# Altium PCB TailLightsPrototypeRev3.PcbDoc
Units mil, origin at the board's own origin, x right, y up, seen from the top; angles counter-clockwise.
Board outline 1745 x 1777.8 mil, 2 copper layers (Top Layer, Bottom Layer); 31 components, 42 nets, 79 pads, 21 vias.
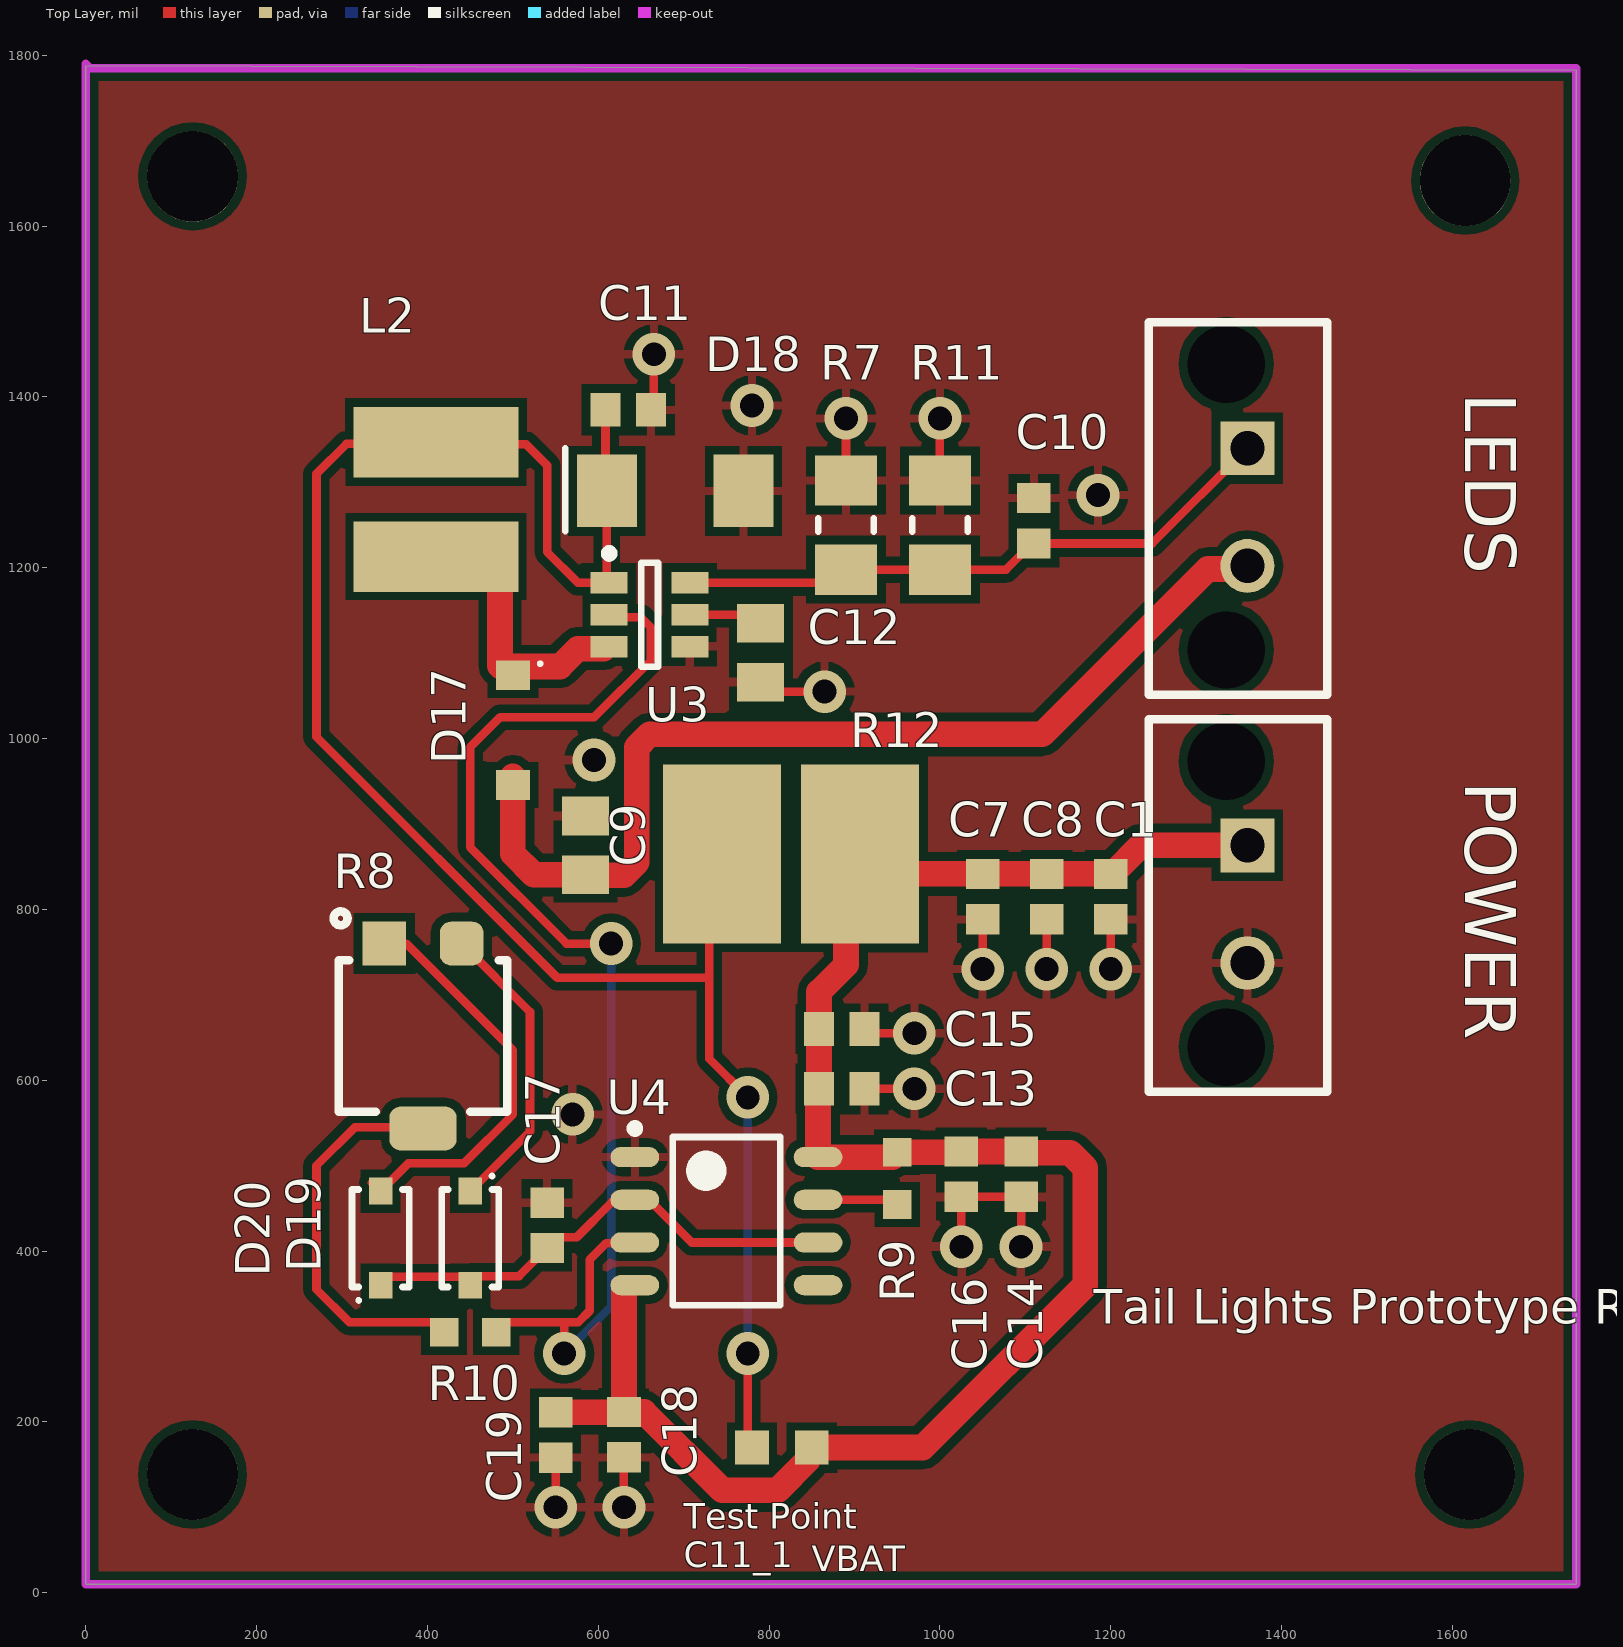
[diagram p0: Top Layer view]
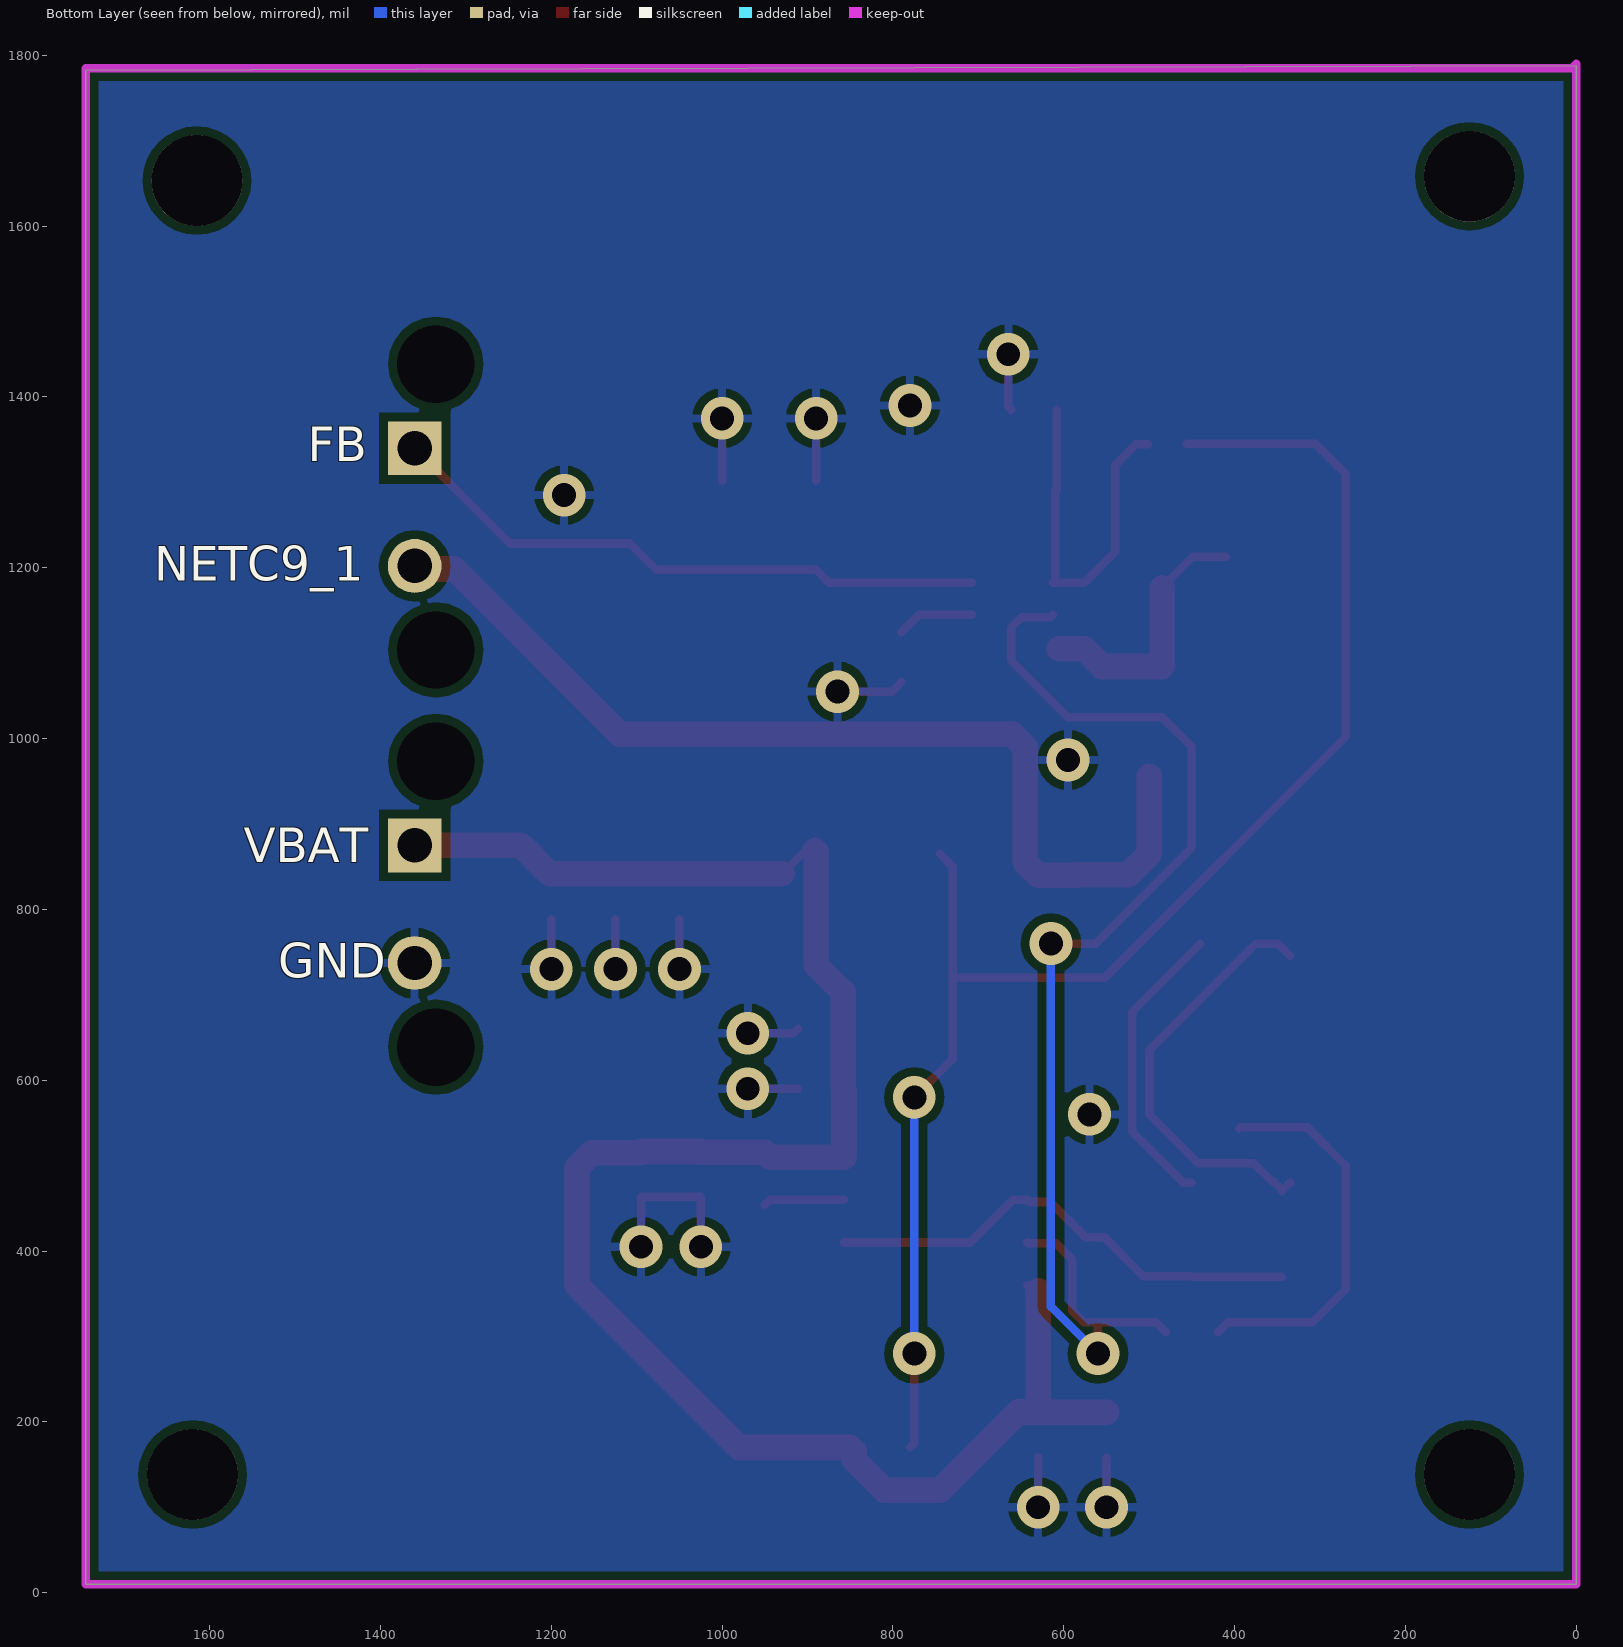
[diagram p1: Bottom Layer view, seen from below]
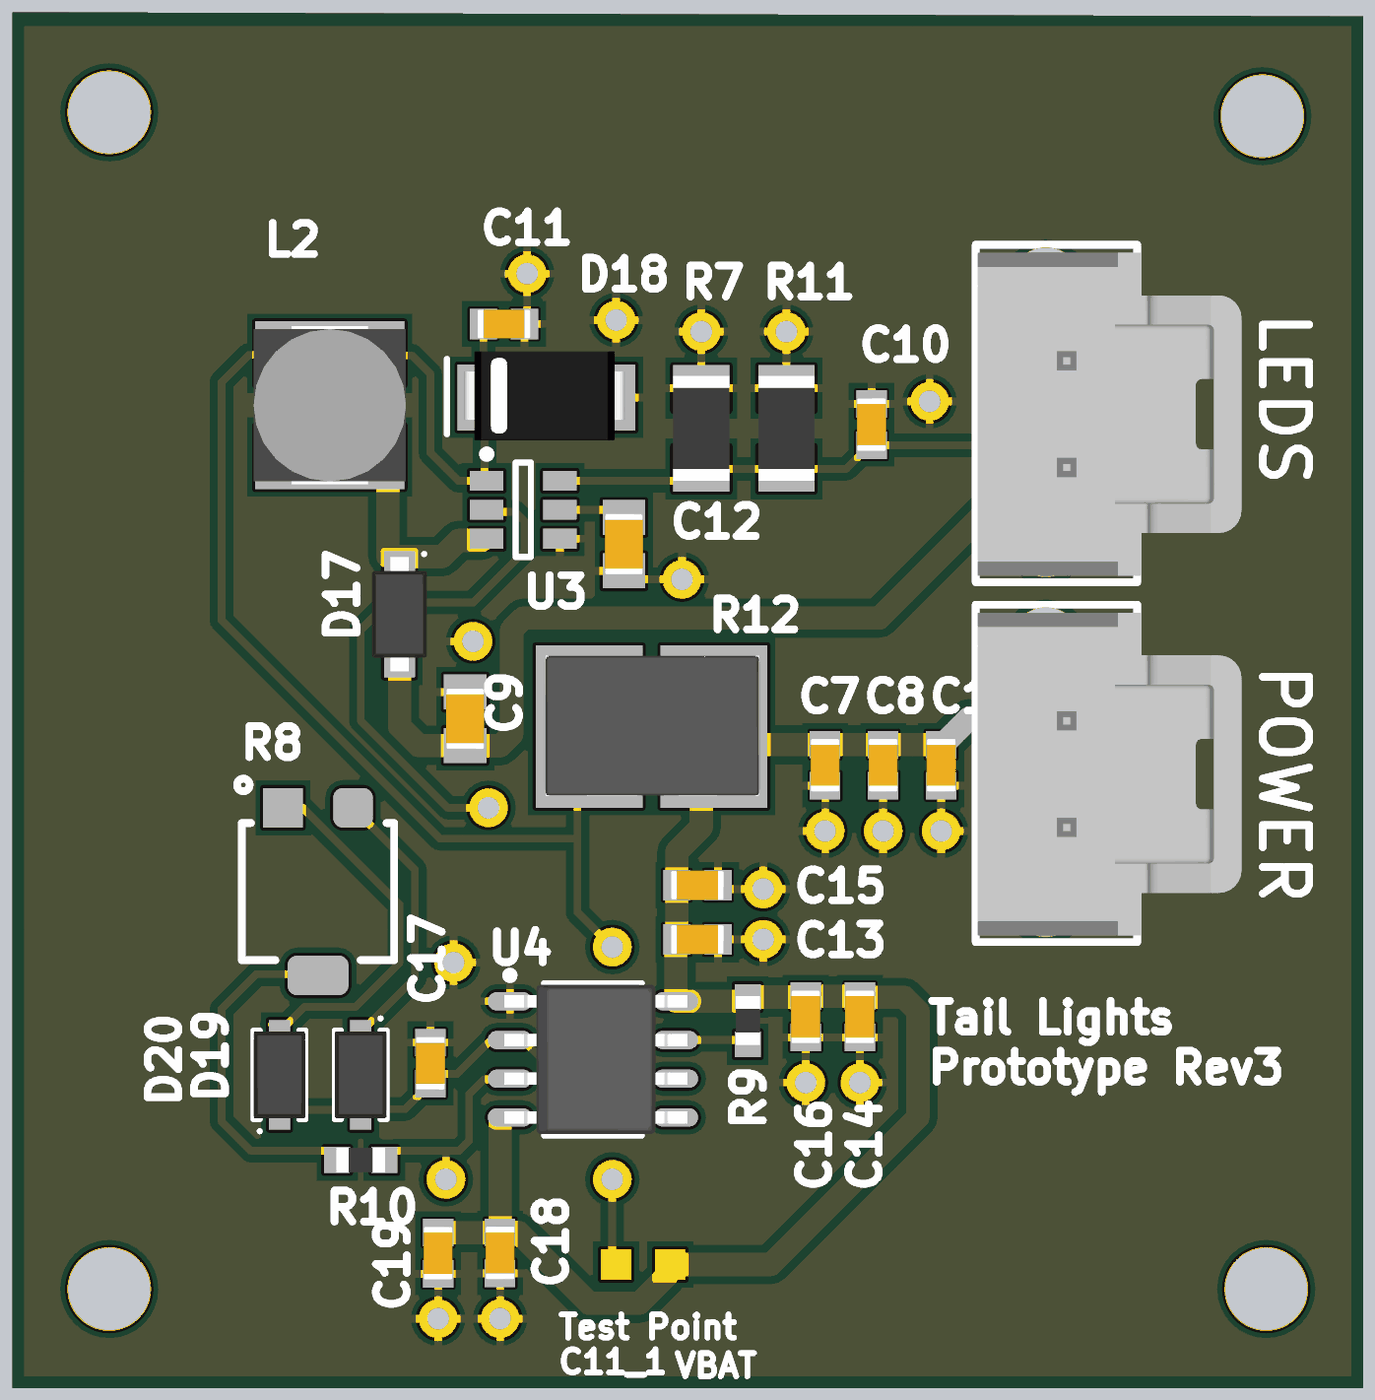
[diagram p2: 3D render of the assembled board from above, using the file's embedded part models]

## Layer stack, top to bottom
Top Solder: solder mask 0.4, Solder Resist, Dk 3.5
Top Layer: signal copper 1.4
Dielectric 1: dielectric 12.6, FR-4, Dk 4.8
Bottom Layer: signal copper 1.4
Bottom Solder: solder mask 0.4, Solder Resist, Dk 3.5

## Board outline
0,1787.8 0,10 1745,10 1745,1782.34

## Design rules (kind name [scope] priority, off if disabled: settings)
Clearance [All] p1: gap=10 ignorepadtopadclearanceinfootprint=FALSE except(0: Arc-Hole Track-Hole SMDPad-Hole THPad-Hole Via-Hole Fill-Hole Poly-Hole Region-Hole Text-Hole)
PolygonConnect [All] p1: connectstyle=Relief reliefconductorwidth=10 reliefentries=4 polygonreliefangle="90 Angle" airgapwidth=10
RoutingVias [All] p1: holewidth=28 width=50 viastyle="Through Hole" minholewidth=28 minwidth=50 maxholewidth=28 maxwidth=50
SolderMaskExpansion [All] p1: expansion=4 istentingtop=FALSE
Width [All] p1: maxlimit=30 minlimit=10 preferedwidth=10 minimp=50.000000 maximp=50.000000 favimp=50.000000
30 further rules are at their usual default settings.

## Classes and differential pairs
component class TailLightPrototypeRev3: C1 C7 C8 C9 C10 C11 C12 C13 C14 C15 C16 C17 C18 C19 D17 D18 D19 D20 L2 LEDS POWER R7 R8 R9 R10 R11 R12 U3 U4

## Components (designator, comment, footprint, x,y, rotation, side; value= is the part's Value field where it differs from the comment)
C1 "CAP CER 4.7UF 25V 10% X5R 0603" "CAP, 0603" 1200,815 r270 top
C7 "CAP CER 0.1UF 50V 10% X7R 0603" "CAP, 0603" 1050,815 r270 top
C8 "CAP CER 4.7UF 25V 10% X5R 0603" "CAP, 0603" 1125,815 r270 top
C9 "CAP CER 4.7UF 50V 10% X5R 0805" "CAP, 0805" 585,875 r90 top value=4.7uF
C10 "CAP CER 10nF 50V 5% X7R 0603" "CAP, 0603" 1110,1255 r90 top
C11 "CAP CER 1UF 50V 10% X7R 0603" "CAP, 0603" 635,1385 r0 top
C12 "CAP CER 0.22UF 50V X7R 0805" "CAP, 0805" 790,1100.55 r270 top
C13 "CAP CER 0.1UF 50V 10% X7R 0603" "CAP, 0603" 885,590 r180 top
C14 "CAP CER 0.1UF 50V 10% X7R 0603" "CAP, 0603" 1095,490 r90 top
C15 "CAP CER 4.7UF 25V 10% X5R 0603" "CAP, 0603" 885,660 r180 top
C16 "CAP CER 4.7UF 25V 10% X5R 0603" "CAP, 0603" 1025,490 r90 top
C17 "CAP CER 6800pF 50V 10% X7R 0603" "CAP, 0603" 540,430 r90 top
C18 "CAP CER 0.1UF 50V 10% X7R 0603" "CAP, 0603" 630,185 r270 top
C19 "CAP CER 4.7UF 25V 10% X5R 0603" "CAP, 0603" 550,184.65 r270 top
D17 "DIODE SCHOTTKY 40V 500MA SOD123" SOD123 500,1010 r270 top
D18 "DIODE ZENER 16V 5W DO-214AA (SMB)" "DO-214AA Diode" 770,1290 r180 top
D19 "DIODE GEN PURP 100V 300MA SOD123" "DIODE GEN PURP 100V 300MA SOD123" 450,415 r270 top
D20 "DIODE GEN PURP 100V 300MA SOD123" "DIODE GEN PURP 100V 300MA SOD123" 345,415 r90 top
L2 "FIXED IND 10UH 1.13A 237 MOHM" INDP5050X20N 410,1280 r270 top
LEDS "CONN 2POS ULTRA-FIT 0.138\"" "CONN, 2POS ULTRA-FIT" 1360,1340 r270 top (schematic designator P5)
POWER "CONN 2POS ULTRA-FIT 0.138\"" "CONN, 2POS ULTRA-FIT" 1360,875 r270 top (schematic designator P4)
R7 "RES SMD 1.15 OHM 1% 1/4W 1206" "RES 1206" 890,1250 r90 top
R8 "POT 20k OHM 20% 1/4W" "20K POT" 394.72,543.46 r90 top value=20K
R9 "1K" "RES, 0603" 950,485 r270 top
R10 "RES 100 OHM 1% 1/10W 0603" "RES, 0603" 450,305 r0 top
R11 "RES SMD 1.15 OHM 1% 1/4W 1206" "RES 1206" 1000,1250 r90 top
R12 "RES 0.05 OHM 1% 7W 2818" "RES 2818" 906.42,865 r180 top
U3 "IC LED DRIVER RGLTR DIM SOT23-6" SOT23-6_N 660,1145 r0 top
U4 "IC OSC SGL TIMER 2.1MHZ 8-SOIC" SOIC8 750,435 r0 top
? "Comment" "Test Point" 850,170 r270 top
? "Comment" "Test Point" 780,170 r270 top

## Footprints (in the part's own frame and the unit in brackets; to place one, negate y for a bottom-side part, rotate by r counter-clockwise, add the part's x,y. Pads: shape width x height; smd on the part's side, far side on the other; paste and mask are expansions set on the pad)
"20K POT" [mm]
  rect 1.3x1.3 smd: 1(5.5,1.15)
  rrect50% 1.3x2 smd: 2(0,0)
  rrect50% 1.3x1.3 smd: 3(5.5,-1.15)
  silkscreen extent 0.5,-2.5 6.46,2.66
"CAP, 0603" [mm] "Chip Capacitor, 2-Leads, Body 1.60x0.81mm, IPC Medium Density"
  rect 0.9x1 smd mask+0.076: 1(-0.675,0) 2(0.675,0)
  body extent -0.87,-0.48 0.87,0.48, height 0.9
"CAP, 0805" [mm] "Chip Capacitor, 2-Leads, Body 2.00x1.25mm, IPC Medium Density"
  rect 1.15x1.4 smd: 1(-0.875,0) 2(0.875,0)
  body extent -1,-0.63 1,0.63, height 1.25
"CONN, 2POS ULTRA-FIT" [mm] "2 Positions Header, Shrouded Connector 0.138\" (3.50mm) Through Hole Gold"
  rect 1.6x1.6 hole 1.02: 1(0,0)
  round 1.6 hole 1.02: 2(3.5,0)
  round 1.6 hole 2.3: ""(-2.5,-0.63) ""(6,-0.63)
  silkscreen extent -3.74,-2.93 7.33,2.37, body extent -3.48,-2.87 7.12,5.79, height 13.85
"DIODE GEN PURP 100V 300MA SOD123" [mm] "Diode Standard 100V 300mA (DC) Surface Mount SOD-123"
  rect 0.8x0.7 smd: 1(-1.4,0) 2(1.4,0)
  silkscreen extent -1.9,-0.85 1.45,0.85, body extent -1.43,-0.85 1.43,0.85, height 1.35
"DO-214AA Diode" [mil] "Zener Diode 16V 5W SMBJ5353B-TP"
  rect 70x85 smd: 1(0,0) 2(160,0)
  silkscreen extent 209,-50 209,47, body extent -21,-60 187,55, height 95
INDP5050X20N [mm] "Precision Wire Wound Inductor, 2-Leads, Body 5.00x5.00mm, IPC Medium Density"
  rect 2.1x4.9 smd: 1(-1.7,0) 2(1.7,0)
  body extent -2.6,-2.5 2.6,2.5, height 2.1
"RES 1206" [mm] "Chip Resistor, 2-Leads, Body 3.20x1.60mm, IPC Medium Density"
  rect 1.5x1.85 smd: 1(-1.325,0) 2(1.325,0)
  silkscreen extent -0.2,-0.82 0.2,0.82, body extent -1.73,-0.92 1.73,0.92, height 0.64
"RES 2818" [mm]
  rect 3.51x5.33 smd: 1(0,0) 2(4.1,0)
  body extent -1.52,-2.32 5.57,2.28, height 1.35
"RES, 0603" [mm] "Chip Resistor, 2-Leads, Body 1.60x0.80mm, IPC Medium Density"
  rect 0.85x0.85 smd: 1(-0.775,0) 2(0.775,0)
  body extent -0.8,-0.4 0.8,0.4, height 0.55
SOD123 [mm] "SODFL, 2-Leads, Body 1.60x3.75mm, IPC Medium Density"
  rect 0.88x1.02 smd: 1(-1.635,0) 2(1.635,0)
  silkscreen extent -2.02,0.76 -1.93,0.86, body extent -1.88,-0.9 1.88,0.9, height 1.28
SOIC8 [mm] "SOIC, 8-Leads, Body 4.91x3.90mm, Pitch 1.27mm, IPC Medium Density"
  oval 1.45x0.6 smd: 1(-2.725,1.905) 2(-2.725,0.635) 3(-2.725,-0.635) 4(-2.725,-1.905) 5(2.725,-1.905) 6(2.725,-0.635) 7(2.725,0.635) 8(2.725,1.905)
  silkscreen extent -2.85,-2.5 1.6,2.88, body extent -2.91,-2.45 3.11,2.45, height 1.63
SOT23-6_N [mm] "SOT23, 6-Leads, Body 2.9x1.6mm, Pitch 0.95mm, Lead Span 2.7mm, IPC Medium Density"
  rect 1.1x0.65 smd: 1(-1.2,0.95) 2(-1.2,0) 3(-1.2,-0.95) 4(1.2,-0.95) 5(1.2,0) 6(1.2,0.95)
  silkscreen extent -1.32,-1.55 0.25,1.95, body extent -0.9,-1.55 0.9,1.55, height 1.45
"Test Point" [mm]
  rect 1x1 smd paste-2: TP(0,0)

## Part data
C1 C8 C15 C16 C19: "4.7µF ±10% 25V Ceramic Capacitor X5R 0603 (1608 Metric)", Capacitance=4.7µF, Manufacturer 1="Murata Electronics North America", Manufacturer Part Number 1=GRM188R61E475KE11D, Operating Temperature="-55°C ~ 85°C", Package / Case="0603 (1608 Metric)", Ratings=-, Supplier Part Number 1=490-7203-1-ND, Temperature Coefficient=X5R, Tolerance=±10%, Voltage=25V, ComponentLink1Description=http://www.murata.com/~/media/webrenewal/support/library/catalog/products/capacitor/mlcc/c02e.ashx, ComponentLink1URL=http://www.murata.com/~/media/webrenewal/support/library/catalog/products/capacitor/mlcc/c02e.ashx, Height - Seated (Max)=-, Lead Spacing=-, Lead Style=-, Mounting Type="Surface Mount, MLCC", Packaging="Cut Tape (CT)", Part Status=Active, Size / Dimension="0.063\" L x 0.031\" W (1.60mm x 0.80mm)", Supplier 1=Digi-Key, Thickness (Max)="0.031\" (0.80mm)"
C7 C13 C14 C18: "0.10µF ±10% 50V Ceramic Capacitor X7R 0603 (1608 Metric)", Capacitance=0.1µF, Manufacturer 1="AVX Corporation", Manufacturer Part Number 1=06035C104KAT2A, Operating Temperature="-55°C ~ 125°C", Package / Case="0603 (1608 Metric)", Ratings=-, Supplier Part Number 1=478-5052-1-ND, Temperature Coefficient=X7R, Tolerance=±10%, Voltage=50V, ComponentLink1Description=http://datasheets.avx.com/X7RDielectric.pdf, ComponentLink1URL=http://datasheets.avx.com/X7RDielectric.pdf, Height - Seated (Max)=-, Lead Spacing=-, Lead Style=-, Mounting Type="Surface Mount, MLCC", Packaging="Cut Tape (CT)", Part Status=Active, Size / Dimension="0.063\" L x 0.032\" W (1.60mm x 0.81mm)", Supplier 1=Digi-Key, Thickness (Max)="0.035\" (0.90mm)"
C9: "4.7µF ±20% 50V Ceramic Capacitor X5R 0805 (2012 Metric)", Manufacturer 1="Murata Electronics North America", Manufacturer Part Number 1=GRT21BR61H475ME13L, Operating Temperature="-55°C ~ 85°C", Package / Case="0805 (2012 Metric)", Ratings=AEC-Q200, Supplier Part Number 1=490-12395-1-ND, Temperature Coefficient=X5R, Tolerance=±20%, Voltage - Rated=50V, Applications=Automotive, Category=Capacitors, ComponentLink1Description=http://search.murata.co.jp/Ceramy/image/img/A01X/G101/ENG/GRT21BR61H475ME13-01.pdf, ComponentLink1URL=http://search.murata.co.jp/Ceramy/image/img/A01X/G101/ENG/GRT21BR61H475ME13-01.pdf, Description 1="CAP CER 4.7UF 50V X5R 0805", Features=-, Height - Seated (Max)=-, Lead Spacing=-, Lead Style=-, Mounting Type="Surface Mount, MLCC", Packaging="Cut Tape (CT)", Part Status=Active, Pricing 1="1=0.56, 10=0.389, 100=0.2338, 500=0.17536, 1000=0.14808 (CAD)", RoHS="RoHS Compliant", Size / Dimension="0.079\" L x 0.049\" W (2.00mm x 1.25mm)", Stock 1=4286, Supplier 1=Digi-Key, Thickness (Max)="0.057\" (1.45mm)"
C10: "10000pF ±5% 50V Ceramic Capacitor U2J 0603 (1608 Metric)", Capacitance=10000pF, Manufacturer 1=KEMET, Manufacturer Part Number 1=C0603C103J5JAC7867, Operating Temperature="-55°C ~ 125°C", Package / Case="0603 (1608 Metric)", Ratings=-, Supplier Part Number 1=399-13384-1-ND, Temperature Coefficient=U2J, Tolerance=±5%, Voltage=50V, ComponentLink1Description=http://www.kemet.com/docfinder?Partnumber=C0603C103J5JAC7867, ComponentLink1URL=http://www.kemet.com/docfinder?Partnumber=C0603C103J5JAC7867, Failure Rate=-, Height - Seated (Max)=-, Lead Spacing=-, Lead Style=-, Mounting Type="Surface Mount, MLCC", Packaging="Cut Tape (CT)", Part Status=Active, Size / Dimension="0.063\" L x 0.032\" W (1.60mm x 0.80mm)", Supplier 1=Digi-Key, Thickness (Max)="0.034\" (0.87mm)"
C11: "1µF ±10% 50V Ceramic Capacitor X7R 0603 (1608 Metric)", Capacitance=1µF, Manufacturer 1="Taiyo Yuden", Manufacturer Part Number 1=UMK107AB7105KA-T, Operating Temperature="-55°C ~ 125°C", Package / Case="0603 (1608 Metric)", Ratings=-, Supplier Part Number 1=587-3247-1-ND, Temperature Coefficient=X7R, Tolerance=±10%, Voltage=50V, ComponentLink1Description=http://www.yuden.co.jp/productdata/catalog/en/mlcc_all_e.pdf, ComponentLink1URL=http://www.yuden.co.jp/productdata/catalog/en/mlcc_all_e.pdf, Height - Seated (Max)=-, Lead Spacing=-, Lead Style=-, Mounting Type="Surface Mount, MLCC", Packaging="Cut Tape (CT)", Part Status=Active, Size / Dimension="0.063\" L x 0.031\" W (1.60mm x 0.80mm)", Supplier 1=Digi-Key, Thickness (Max)="0.037\" (0.95mm)"
C12: Capacitance=220nF, Case/Package=0805, Case Code (Metric)=2012, Dielectric=X7R, Manufacturer=Samsung, Manufacturer Part Number=CL21B224KBFNNNE, Max Operating Temperature=125°C, Min Operating Temperature=-55°C, Package Quantity=1, Supplier Part Number 1=1276-1093-6-ND, Tolerance=10%, Voltage=50V, Case Code (Imperial)=0805, ComponentLink1Description=https://www.verical.com/server-webapp/html/getDatasheet?partID=358363&src-supplier=Verical, ComponentLink1URL=https://www.verical.com/server-webapp/html/getDatasheet?partID=358363&src-supplier=Verical, Contact Plating=Tin, Depth=1.25mm, Height=1.25mm, Lead Free="Lead Free", Length=2mm, Mount="Surface Mount", Packaging="Tape and Reel", Pricing 1="1=0.11, 10=0.077, 100=0.0361, 500=0.02532, 1000=0.02096 (USD)", Radiation Hardening=No, Stock 1=219478, Supplier 1=Digi-Key, Thickness=0.053inch, Voltage Rating=50V, Voltage Rating (DC)=50V, Width=0.049inch
C17: "6800pF ±10% 50V Ceramic Capacitor X7R 0603 (1608 Metric)", Capacitance=6800pF, Manufacturer 1="Samsung Electro-Mechanics America, Inc.", Manufacturer Part Number 1=CL10B682KB8SFNC, Operating Temperature="-55°C ~ 125°C", Package / Case="0603 (1608 Metric)", Ratings=-, Supplier Part Number 1=1276-2103-1-ND, Temperature Coefficient=X7R, Tolerance=±10%, Voltage=50V, ComponentLink1Description=http://www.samsungsem.com/kr/support/product-search/mlcc/CL10B682KB8SFNC.jsp, ComponentLink1URL=http://www.samsungsem.com/kr/support/product-search/mlcc/CL10B682KB8SFNC.jsp, Height - Seated (Max)=-, Lead Spacing=-, Lead Style=-, Mounting Type="Surface Mount, MLCC", Packaging="Cut Tape (CT)", Part Status=Active, Size / Dimension="0.063\" L x 0.031\" W (1.60mm x 0.80mm)", Supplier 1=Digi-Key, Thickness (Max)="0.035\" (0.90mm)"
D17: "Diode Schottky 40V 500mA Surface Mount SOD-123", Average Rectified Current=500mA, Current Rating=500A, Forward Voltage=620mV, Manufacturer="ON Semiconductor / Fairchild", Manufacturer Part Number=MBR0540, Max Forward Surge Current (Ifsm)=5.5A, Max Operating Temperature=125°C, Max Repetitive Reverse Voltage (Vrrm)=40V, Max Reverse Leakage Current=20uA, Min Operating Temperature=-65°C, Package Quantity=3000, Power Dissipation=400mW, Supplier Part Number 1=MBR0540DKR-ND, ComponentLink1Description=datasheet, ComponentLink1URL=https://www.onsemi.cn/PowerSolutions/document/MBR0540-D.pdf, ComponentLink2Description="supplier link", ComponentLink2URL=https://www.onsemi.com/PowerSolutions/product.do?id=MBR0540, ComponentLink3Description=https://www.fairchildsemi.com/datasheets/MB/MBR0540.pdf?src-supplier=Digi-Key, ComponentLink3URL=https://www.fairchildsemi.com/datasheets/MB/MBR0540.pdf?src-supplier=Digi-Key, ComponentLink4Description=https://www.onsemi.cn/PowerSolutions/document/MBR0540-D.pdf?src-supplier=Digi-Key, ComponentLink4URL=https://www.onsemi.cn/PowerSolutions/document/MBR0540-D.pdf?src-supplier=Digi-Key, ComponentLink5Description=http://www.jameco.com/Jameco/Products/ProdDS/975060.pdf?src-supplier=Jameco, ComponentLink5URL=http://www.jameco.com/Jameco/Products/ProdDS/975060.pdf?src-supplier=Jameco, ComponentLink6Description=http://www.mouser.com/ds/2/149/MBR0540-90522.pdf?src-supplier=Mouser, ComponentLink6URL=http://www.mouser.com/ds/2/149/MBR0540-90522.pdf?src-supplier=Mouser, ComponentLink7Description=https://www.verical.com/server-webapp/html/getDatasheet?partID=110131&src-supplier=Verical, ComponentLink7URL=https://www.verical.com/server-webapp/html/getDatasheet?partID=110131&src-supplier=Verical, ComponentLink8Description=http://www.farnell.com/datasheets/2041480.pdf?src-supplier=Element14, ComponentLink8URL=http://www.farnell.com/datasheets/2041480.pdf?src-supplier=Element14, ComponentLink9Description=https://www.fairchildsemi.com/datasheets/MB/MBR0540.pdf?src-supplier=Avnet, ComponentLink9URL=https://www.fairchildsemi.com/datasheets/MB/MBR0540.pdf?src-supplier=Avnet, Contact Plating=Tin,Matte, Element Configuration=Single, Forward Current=500mA, Height=1.03mm, Lead Free="Lead Free", Length=2.7mm, Max Reverse Voltage (DC)=40V, Max Surge Current=5.5A, Mount="Surface Mount", Number of Pins=2, Output Current=500mA, Packaging="Tape and Reel", Peak Non-Repetitive Surge Current=5.5A, Peak Reverse Current=20uA, Polarity=Standard, Pricing 1="1=0.2, 10=0.166, 100=0.0881, 500=0.05794, 1000=0.0394 (USD)", Radiation Hardening=No, REACH SVHC="No SVHC", Stock 1=414620, Supplier 1=Digi-Key, Voltage Rating (DC)=40V, Weight=0.03g, Width=1.6mm
D18: "Zener Diode 16V 5W ±5% Surface Mount DO-214AA (SMB)", Manufacture="Micro Commercial Co", Manufacture Part Number=SMBJ5353B-TP, Power (Max)=5W, Supplier Part Number 1=SMBJ5353B-TPMSCT-ND, Voltage - Forward="1.2V @ 1A", Voltage - Zener (Nom)=16V, Impedence (Max)="2.5 Ohm", Supplier 1=Digi-Key
D19 D20: "Diode Standard 100V 300mA (DC) Surface Mount SOD-123", Case/Package=SOD-123-2, Forward Current=300mA, Forward Voltage=1.25V, Manufacturer="Diodes Zetex", Manufacturer Part Number=1N4148WQ-7-F, Max Operating Temperature=150°C, Max Power Dissipation=400mW, Max Repetitive Reverse Voltage (Vrrm)=100V, Max Surge Current=2A, Min Operating Temperature=-65°C, Package Quantity=3000, Peak Reverse Current=50uA, Supplier Part Number 1=1N4148WQ-7-FDICT-ND, ComponentLink1Description=http://components.arrow.com/part/dataview/0323_07206809, ComponentLink1URL=http://components.arrow.com/part/dataview/0323_07206809, ComponentLink2Description=http://www.diodes.com/datasheets/ds30086.pdf, ComponentLink2URL=http://www.diodes.com/datasheets/ds30086.pdf, ComponentLink3Description=http://www.mouser.com/ds/2/115/ds30086-318161.pdf, ComponentLink3URL=http://www.mouser.com/ds/2/115/ds30086-318161.pdf, Contact Plating=Tin,Matte, Element Configuration=Single, Lead Free="Lead Free", Mount="Surface Mount", Number of Pins=2, Packaging="Tape and Reel", Peak Non-Repetitive Surge Current=2A, Pricing 1="1=0.22, 10=0.196, 100=0.107, 500=0.0658, 1000=0.0449 (USD)", Recovery Time=4ns, Reverse Recovery Time=4ns, Stock 1=229, Supplier 1=Digi-Key, Weight=0.000353oz
L2: "10µH Shielded Wirewound Inductor 1.13A 237mOhm Max Nonstandard", Case/Package=2020, Current Rating=1.13A, DC Resistance (DCR)=237mR, Inductance=10uH, Inductance Tolerance=20%, Manufacturer=TDK, Manufacturer Part Number=VLCF5020T-100M1R1-1, Max Operating Temperature=105°C, Min Operating Temperature=-40°C, Package Quantity=500, RMS Current (Irms)=1.5A, Supplier Part Number 1=445-3209-2-ND, Test Frequency=100kHz, ComponentLink1Description=http://www.onlinecomponents.com/productFiles/mf-TDK/e531_vlcf5020_1.pdf?src-supplier=Onlinecomponents.com, ComponentLink1URL=http://www.onlinecomponents.com/productFiles/mf-TDK/e531_vlcf5020_1.pdf?src-supplier=Onlinecomponents.com, ComponentLink2Description=http://www.mouser.com/ds/2/400/e531_vlcf-18500.pdf?src-supplier=Mouser, ComponentLink2URL=http://www.mouser.com/ds/2/400/e531_vlcf-18500.pdf?src-supplier=Mouser, ComponentLink3Description=http://www.farnell.com/datasheets/516785.pdf?src-supplier=Element14, ComponentLink3URL=http://www.farnell.com/datasheets/516785.pdf?src-supplier=Element14, ComponentLink4Description=http://uk.rs-online.com/webdocs/1538/0900766b81538dbe.pdf?src-supplier=RSComponents, ComponentLink4URL=http://uk.rs-online.com/webdocs/1538/0900766b81538dbe.pdf?src-supplier=RSComponents, ComponentLink5Description=https://www.verical.com/server-webapp/html/getDatasheet?partID=107508&src-supplier=Verical, ComponentLink5URL=https://www.verical.com/server-webapp/html/getDatasheet?partID=107508&src-supplier=Verical, Composition=Wirewound, Core Material=Ferrite, DC Current=1.13A, Depth=5.2mm, Height=2mm, Height - Seated (Max)=0.079inch, Lead Free="Lead Free", Length=0.197inch, Max DC Current=1.13A, Military Standard=Not, Mount="Surface Mount", Number of Pins=2, Packaging="Tape and Reel", Pricing 1="500=0.441, 1000=0.357, 2500=0.336, 5000=0.3255, 12500=0.315, 25000=0.3045 (USD)", Radiation Hardening=No, REACH SVHC="No SVHC", Saturation Current=1.13A, Shielding=Shielded, Stock 1=12500, Supplier 1=Digi-Key, Termination=SMD/SMT, Tolerance=20%, Width=0.197inch
LEDS: "2 Positions Header, Shrouded Connector 0.138\" (3.50mm) Through Hole Gold", Current Rating=-, Insulation Color=Black, Manufacturer 1="Molex, LLC", Manufacturer Part Number 1=1722861302, Material Flammability Rating="UL94 V-0", Operating Temperature="-40°C ~ 120°C", Supplier Part Number 1=WM11673-ND, Voltage=400V, ComponentLink1Description=http://www.molex.com/pdm_docs/sd/1722861302_sd.pdf, ComponentLink1URL=http://www.molex.com/pdm_docs/sd/1722861302_sd.pdf, Connector Type=Header, Contact Finish - Mating=Gold, Contact Finish - Post=Tin, Contact Finish Thickness - Mating="30µin (0.76µm)", Contact Finish Thickness - Post="60µin (1.52µm)", Contact Length - Mating=-, Contact Length - Post="0.126\" (3.20mm)", Contact Material="Copper Alloy", Contact Shape=Square, Contact Type="Male Pin", Fastening Type="Latch Holder", Ingress Protection=-, Insulation Height="0.465\" (11.80mm)", Insulation Material="Liquid Crystal Polymer (LCP)", Mated Stacking Heights=26.99mm, Mounting Type="Through Hole", Number of Positions=2, Number of Positions Loaded=All, Number of Rows=1, Overall Contact Length=-, Packaging=Tray, Part Status=Active, Pitch - Mating="0.138\" (3.50mm)", Row Spacing - Mating=-, Series=UltraFit, Shrouding="Shrouded - 4 Wall", Style="Board to Board or Cable", Supplier 1=Digi-Key, Termination="Kinked Pin, Solder"
POWER: "Connector Header Through Hole 2 position 0.138\" (3.50mm)", Color=Black, Manufacturer=Molex, Manufacturer Part Number=1722871102, Supplier Part Number 1=WM11701-ND, ComponentLink1Description=http://www.molex.com/pdm_docs/sd/1722861302_sd.pdf, ComponentLink1URL=http://www.molex.com/pdm_docs/sd/1722861302_sd.pdf, Connector Type="Male Pin", Contact Plating=Tin, Fastening Type=Latch, Mount="Through Hole", Number of Positions=2, Number of Rows=1, Packaging=Tray, Pitch=0.138inch, Pricing 1="1 = 0.78000, 10 = 0.68800, 100 = 0.59380, 500 = 0.48582, 1000 = 0.43184, 5000 = 0.37786, 10000 = 0.35897 (USD)", RoHS=Yes, Series=UltraFit, Stock 1=2743, Supplier 1=Digi-Key, Termination=Solder
R7 R11: Case/Package=1206, Manufacturer=Yageo, Manufacturer Part Number=RC1206FR-071R15L, Max Operating Temperature=155°C, Min Operating Temperature=-55°C, Resistance=1.15R, Supplier Part Number 1=311-1.15FRDKR-ND, Temperature Coefficient=200ppm/°C, Tolerance=1%, Voltage Rating (DC)=200V, Composition="Thick Film", Contact Plating=Tin,Matte, Lead Free="Lead Free", Pricing 1="1=0.15, 10=0.133, 100=0.0512, 1000=0.02252, 2500=0.01945 (USD)", Radiation Hardening=No, Stock 1=34622, Supplier 1=Digi-Key
R8: "20k Ohm 0.25W, 1/4W Gull Wing Surface Mount Trimmer Potentiometer", Manufacture="TT Electronics/BI", Manufacture Part Number=23BR20KLFTR, Power=1/4W, Supplier Part Number 1=987-1016-1-ND, Tolerence=20%, Adjustment Type=Top, Supplier 1=Digi-Key, Turns=1
R9: library part "RES 1K OHM 5% 1/10W 0603", "1k Ohm ±5% 0.1W, 1/10W Chip Resistor 0603 (1608 Metric)", Manufacturer=Yageo, Manufacturer Part Number=RC0603JR-071KL, Operating Temperature="-55°C ~ 155°C", Package / Case="0603 (1608 Metric)", Power (Watts)="0.1W, 1/10W", Resistance (Ohms)=1k, Supplier Device Package=0603, Supplier Part Number 1=311-1.0KGRCT-ND, Temperature Coefficient=±100ppm/°C, Tolerance=±5%, Category=Resistors, ComponentLink1Description=http://www.yageo.com/documents/recent/PYu-RC_Group_51_RoHS_L_7.pdf, ComponentLink1URL=http://www.yageo.com/documents/recent/PYu-RC_Group_51_RoHS_L_7.pdf, Composition="Thick Film", Failure Rate=-, Features="Moisture Resistant", Height - Seated (Max)="0.022\" (0.55mm)", Packaging="Cut Tape (CT)", Part Status=Active, Pricing 1="1=0.15, 10=0.017, 100=0.0071, 1000=0.0032, 2500=0.00278 (CAD)", RoHS="RoHS Compliant", Size / Dimension="0.063\" L x 0.031\" W (1.60mm x 0.80mm)", Stock 1=4415240, Supplier 1=Digi-Key
R10: "100 Ohm ±1% 0.1W, 1/10W Chip Resistor 0603 (1608 Metric) Moisture Resistant Thick Film", Manufacturer 1=Yageo, Manufacturer Part Number 1=RC0603FR-07100RL, Operating Temperature="-55°C ~ 155°C", Package / Case="0603 (1608 Metric)", Power=1/10W, Resistance=100, Supplier Device Package=0603, Supplier Part Number 1=311-100HRCT-ND, Temperature Coefficient=±100ppm/°C, Tolerance=±1%, ComponentLink1Description=http://www.yageo.com/documents/recent/PYu-RC_Group_51_RoHS_L_7.pdf, ComponentLink1URL=http://www.yageo.com/documents/recent/PYu-RC_Group_51_RoHS_L_7.pdf, Composition="Thick Film", Failure Rate=-, Height - Seated (Max)="0.022\" (0.55mm)", Packaging="Cut Tape (CT)", Part Status=Active, Size / Dimension="0.063\" L x 0.031\" W (1.60mm x 0.80mm)", Supplier 1=Digi-Key
R12: "50 mOhms ±1% 7W Chip Resistor Nonstandard Automotive AEC-Q200, Current Sense, Moisture Resistant, Pulse Withstanding Metal Element", Case/Package=2818, Manufacturer 1="Vishay Dale", Manufacturer Part Number 1=WSHM2818R0500FEA, Max Operating Temperature=170°C, Max Power Dissipation=7W, Min Operating Temperature=-65°C, Resistance=50mR, Supplier Part Number 1=541-2633-1-ND, Temperature Coefficient=75ppm/°C, Tolerance=1%, ComponentLink1Description=http://www.mouser.com/ds/2/427/wshm2818-469484.pdf?src-supplier=Mouser, ComponentLink1URL=http://www.mouser.com/ds/2/427/wshm2818-469484.pdf?src-supplier=Mouser, ComponentLink2Description=http://www.vishay.com/docs/30188/wshm2818.pdf?src-supplier=Digi-Key, ComponentLink2URL=http://www.vishay.com/docs/30188/wshm2818.pdf?src-supplier=Digi-Key, ComponentLink3Description=http://www.vishay.com/docs/49536/_wshm2818_vmn-pt0284.pdf?src-supplier=Digi-Key, ComponentLink3URL=http://www.vishay.com/docs/49536/_wshm2818_vmn-pt0284.pdf?src-supplier=Digi-Key, Composition="Metal Element", Features="Moisture Resistant,Automotive AEC-Q200", Height=0.069inch, Length=0.28inch, Number of Terminations=2, Packaging="Tape and Reel", Pricing 1="1=1.41000, 10=1.25300, 25=1.15200, 50=1.05100, 100=0.90960, 250=0.76808, 500=0.64680, 1000=0.53765 (USD)", RoHS=Yes, Stock 1=2548, Supplier 1=Digi-Key, Width=0.181inch
U3: "LED Driver IC 1 Output DC DC Regulator Step-Up (Boost) PWM Dimming 1.2A (Switch) SOT-23-6", Case/Package=SOT-23-6, Frequency=1.2MHz, Manufacturer="Texas Instruments", Manufacturer Part Number=TPS61165TDBVRQ1, Max Input Voltage=18V, Max Operating Temperature=105°C, Max Supply Current=2.3mA, Min Input Voltage=3V, Min Operating Temperature=-40°C, Output Current=1.2A, Output Voltage=38V, Package Quantity=3000, Quiescent Current=1.5mA, Supplier Part Number 1=TPS61165TDBVRQ1-ND, ComponentLink1Description=datasheet, ComponentLink1URL=http://www.ti.com/lit/ds/symlink/tps61165.pdf, ComponentLink2Description=http://www.ti.com/lit/gpn/tps61165-q1?src-supplier=Mouser, ComponentLink2URL=http://www.ti.com/lit/gpn/tps61165-q1?src-supplier=Mouser, ComponentLink3Description=https://www.verical.com/server-webapp/html/getDatasheet?partID=676299&src-supplier=Verical, ComponentLink3URL=https://www.verical.com/server-webapp/html/getDatasheet?partID=676299&src-supplier=Verical, ComponentLink4Description=http://www.ti.com/lit/ds/symlink/tps61165-q1.pdf?src-supplier=Digi-Key, ComponentLink4URL=http://www.ti.com/lit/ds/symlink/tps61165-q1.pdf?src-supplier=Digi-Key, Dimming=PWM, Lead Free="Lead Free", Max Supply Voltage=18V, Min Supply Voltage=3V, Number of Channels=1, Number of Outputs=1, Number of Pins=6, Number of Segments=3, Output Current per Channel=1.2A, Packaging="Tape and Reel", Radiation Hardening=No, Stock 1=0, Supplier 1=Digi-Key, Topology=Boost
U4: "555 Type, Timer/Oscillator (Single) IC 2.1MHz 8-SOIC", Case/Package=SOIC, Frequency=2.1MHz, High Level Output Current=-10mA, Low Level Output Current=100mA, Manufacturer="Texas Instruments", Manufacturer Part Number=TLC555QDRQ1, Max Operating Temperature=125°C, Max Power Dissipation=725mW, Max Supply Voltage=15V, Min Operating Temperature=-40°C, Min Supply Voltage=2V, Nominal Supply Current=170uA, Operating Supply Current=360uA, Package Quantity=2500, Supplier Part Number 1=296-22999-2-ND, ComponentLink1Description=http://focus.ti.com/lit/ds/symlink/tlc555-q1.pdf?src-supplier=Avnet, ComponentLink1URL=http://focus.ti.com/lit/ds/symlink/tlc555-q1.pdf?src-supplier=Avnet, ComponentLink2Description=http://www.farnell.com/datasheets/1806066.pdf?src-supplier=Element14, ComponentLink2URL=http://www.farnell.com/datasheets/1806066.pdf?src-supplier=Element14, ComponentLink3Description=https://www.verical.com/server-webapp/html/getDatasheet?partID=297376&src-supplier=Verical, ComponentLink3URL=https://www.verical.com/server-webapp/html/getDatasheet?partID=297376&src-supplier=Verical, ComponentLink4Description=http://www.ti.com/lit/ds/symlink/tlc555-q1.pdf?src-supplier=Digi-Key, ComponentLink4URL=http://www.ti.com/lit/ds/symlink/tlc555-q1.pdf?src-supplier=Digi-Key, Contact Plating=Gold, Lead Free="Lead Free", Mount="Surface Mount", Number of Pins=8, Number of Timers/Counters=1, Packaging="Tape and Reel", Power Dissipation=725mW, Pricing 1="2500=0.3528, 5000=0.33516, 12500=0.32256 (USD)", Quiescent Current=170uA, Radiation Hardening=No, REACH SVHC="No SVHC", Stock 1=60000, Supplier 1=Digi-Key, Weight=0.002561oz

## Free pads (board coordinates)
  round 106.3 hole 106.3: ""(125,138.33) ""(125,1658.33) ""(1615,1653.33) ""(1620,138.33)

## Via types
v1: diameter 50, hole 28, Top Layer to Bottom Layer, 21 vias

## Nets (pads, with @x,y where several pads share a name; then routed paths per layer and width w, separated by ;. In a path a pad name is that pad's centre, name@x,y a point inside that pad or via, vN(x,y) a via of type N, cw(c..) or ccw(c..) an arc to the next point about the centre after c; other vN are vias at no path point)
6V6: 
CTRL: R10.2 U3.2 U4.3 | length 1450.7
  Top Layer w10: R10.2 492.24,316.73 576.73,316.73 590,330 590,390 609.03,409.03 641.75,409.03 U4.3 ; v1(560,280) 560,310.87 ; U3.2 615.59,1142.17 649.41,1142.17 661.57,1130 661.57,1091.57 595,1025 485,1025 450,990 450,872.57 562.57,760 v1(615,760)
  Bottom Layer w10: v1(560,280) 615,335 v1(615,760)
FB: C10.1 LEDS.1 R7.1 R11.1 U3.6 | length 718
  Top Layer w10: U3.6 874.57,1182.4 R7.1 R11.1 1077.44,1197.83 1108.03,1228.43 C10.1 1248.43,1228.43 LEDS.1
GND: C1.2 C7.2 C8.2 C9.2 C10.2 C11.2 C12.2 C13.1 C14.1 C15.1 C16.1 C17.2 C18.2 C19.2 D18.1 POWER.2 R7.2 R11.2 U3.4 U4.1 | length 889.2
  Top Layer w10: v1(550,100) C19.2 ; v1(630,100) C18.2 ; C11.2 665,1388.43 v1(665,1450) ; C12.2 801.1,1055 v1(865,1055) ; R7.2 v1(890,1375) ; C13.1 v1(970,590) ; C15.1 916.57,655 v1(970,655) ; R11.2 v1(1000,1375) ; v1(1025,405) C16.1 C14.1 v1(1095,405) ; v1(1050,730) C7.2 ; v1(1125,730) C8.2 ; v1(1200,730) C1.2
  other v1: 570,560 595,975 1185,1285 780,1390
NetC2_1: 
NetC3_1: 
NetC4_1: 
NetC5_2: 
NetC9_1: C9.1 D17.2 LEDS.2 | length 1190.1
  Top Layer w10: C9.1 C9.1@585.55,840 ; LEDS.2@1356.3,1198.5 LEDS.2
  Top Layer w30: D17.2@500,955.63 D17.2 500,865 524.45,840.55 C9.1 ; C9.1@585.55,840 630,840 645,855 645,990 660,1005 1120,1005 1313.5,1198.5 LEDS.2@1356.3,1198.5
NetC11_1: ?.TP@780,170 C11.1 D18.2 L2.1 R12.2 U3.1 | length 2249.7
  Top Layer w10: L2.1@455.87,1345 305,1345 270,1310 270,1002.01 552.01,720 730,720 ; L2.1@501.19,1344.67 501.46,1344.4 515.6,1344.4 540,1320 540,1218.5 576.1,1182.4 U3.1 610,1185.16 D18.2 608.43,1291.57 C11.1 ; R12.2 730,850 730,720 ; v1(775,280) 775,175 ?.TP@780,170 ; v1(775,580) 730,625 730,720
  Bottom Layer w10: v1(775,280) v1(775,580)
NetC12_1: C12.1 U3.5 | length 91.3
  Top Layer w10: U3.5 769.45,1145 C12.1@790,1124.45
NetC17_1: C17.1 D19.2 D20.1 U4.2 U4.6 | length 570.3
  Top Layer w10: D20.1@345,369.88 450,369.88 450.83,370.71 507.28,370.71 552.72,416.14 574.68,416.14 615.93,457.39 640.11,457.39 U4.2 659.45,460 709.45,410 U4.6
NetD1_3: 
NetD2_3: 
NetD3_3: 
NetD4_3: 
NetD7_3: 
NetD8_3: 
NetD9_1: 
NetD10_3: 
NetD12_3: 
NetD13_3: 
NetD14_3: 
NetD15_1: 
NetD16_2: 
NetD19_1: D19.1 R8.3 | length 347.9
  Top Layer w10: R8.3 520,680 520,540 460.12,480.12 D19.1@450,480.12
NetD20_2: D20.2 R8.1 | length 505.3
  Top Layer w10: D20.2@335,480.12 D20.2 345,472.09 353.78,480.87 355.75,480.87 377.76,502.87 442.87,502.87 500,560 500,635 375,760 R8.1 R8.1@335,745.55
NetD21_2: 
NetD21_3: 
NetD22_3: 
NetD23_3: 
NetD24_3: 
NetD25_3: 
NetR2_2: 
NetR3_2: 
NetR4_2: 
NetR8_2: R8.2 R10.1 | length 459.2
  Top Layer w10: R8.2 393.19,545 315,545 270,500 270,355 308.27,316.73 407.76,316.73 R10.1
NetR9_2: R9.2 U4.7 | length 95
  Top Layer w10: U4.7 944.49,460 R9.2
SW: D17.1 L2.2 U3.3 | length 311.8
  Top Layer w10: L2.2 448.58,1213.07 L2.2@484.92,1176.73 ; D17.1@484.92,1085.08 D17.1@485.63,1084.37
  Top Layer w30: D17.1@484.92,1085.08 L2.2@484.92,1176.73 ; D17.1@485.63,1084.37 555.08,1084.37 576.1,1105.39 U3.3@606.1,1105.39
VBAT: ?.TP@850,170 C1.1 C7.1 C8.1 C13.2 C14.2 C15.2 C16.2 C18.1 C19.1 POWER.1 R9.1 R12.1 U4.4 U4.8 | length 2252.7
  Top Layer w10: C18.1@629.65,211.22 C18.1 ; U4.4@630,353.71 636.29,360 U4.4 ; C13.2@857.28,588.86 C13.2 ; R12.1@891.42,880 R12.1@929.84,841.57 ; R9.1@944.49,510 R9.1 ; C16.2@1023.94,515.51 C16.2 ; C1.1 C1.1@1201.97,841.57
  Top Layer w30: C19.1 C18.1@629.65,211.22 ; U4.4@630,353.71 C18.1 653.43,211.57 745,120 810,120 845.31,155.31 845.31,165.31 850,170 980,170 1170,360 1170,497.43 1152.43,515 1096.57,515 C14.2 C16.2 ; C13.2@857.28,588.86 U4.8 R9.1@944.49,510 ; C13.2 C15.2 858.43,703.43 890,735 890,867.17 R12.1@891.42,868.58 ; R12.1@929.84,841.57 C7.1 C8.1 C1.1 ; R9.1 C16.2@1023.94,515.51 ; C1.1@1201.97,841.57 1235.39,875 POWER.1
VDD: 
VIN: 
pads on no net: LEDS. POWER. U4.5

## Polygon pours and split planes (outlines as drawn)
GND on Top Layer "Top Layer-GND 1" (solid, pour order 12): 5,1785 0,1780 0,10 1745,10 1745,1785
GND on Bottom Layer "Bottom Layer-GND 1" (solid, pour order 14): 2.5,1787.5 2.5,12.5 0,10 1745,10 1745,1785

## Keep-outs
Keep-Out Layer:
  lines w10: 0,10 0,1790 5,1785 1745,1785 1745,10 0,10

## Silkscreen, mask and mechanical layers (free items; w line width, h text height)
Top Overlay:
  text "Tail Lights Prototype Rev3" at 1180,315 h40
  text "Test Point" at 700,75 h30
  text "C11_1" at 700,30 h30
  text "VBAT" at 850,25 h30
Bottom Overlay:
  text "FB" at 1485,1325 h40
  text "NETC9_1" at 1665,1185 h40
  text "VBAT" at 1560,855 h40
  text "GND" at 1520,720 h40